# Altium PCB PCB1.PcbDoc
Units mm, origin at the board's own origin, x right, y up, seen from the top; angles counter-clockwise.
Board outline 50.8 x 32.51 mm, 4 copper layers (Top Electric, MidTop Electric, MidBot Electric, Bottom Electric), stack 0.603 mm thick; 10 components, 12 nets, 29 pads, 20 vias.
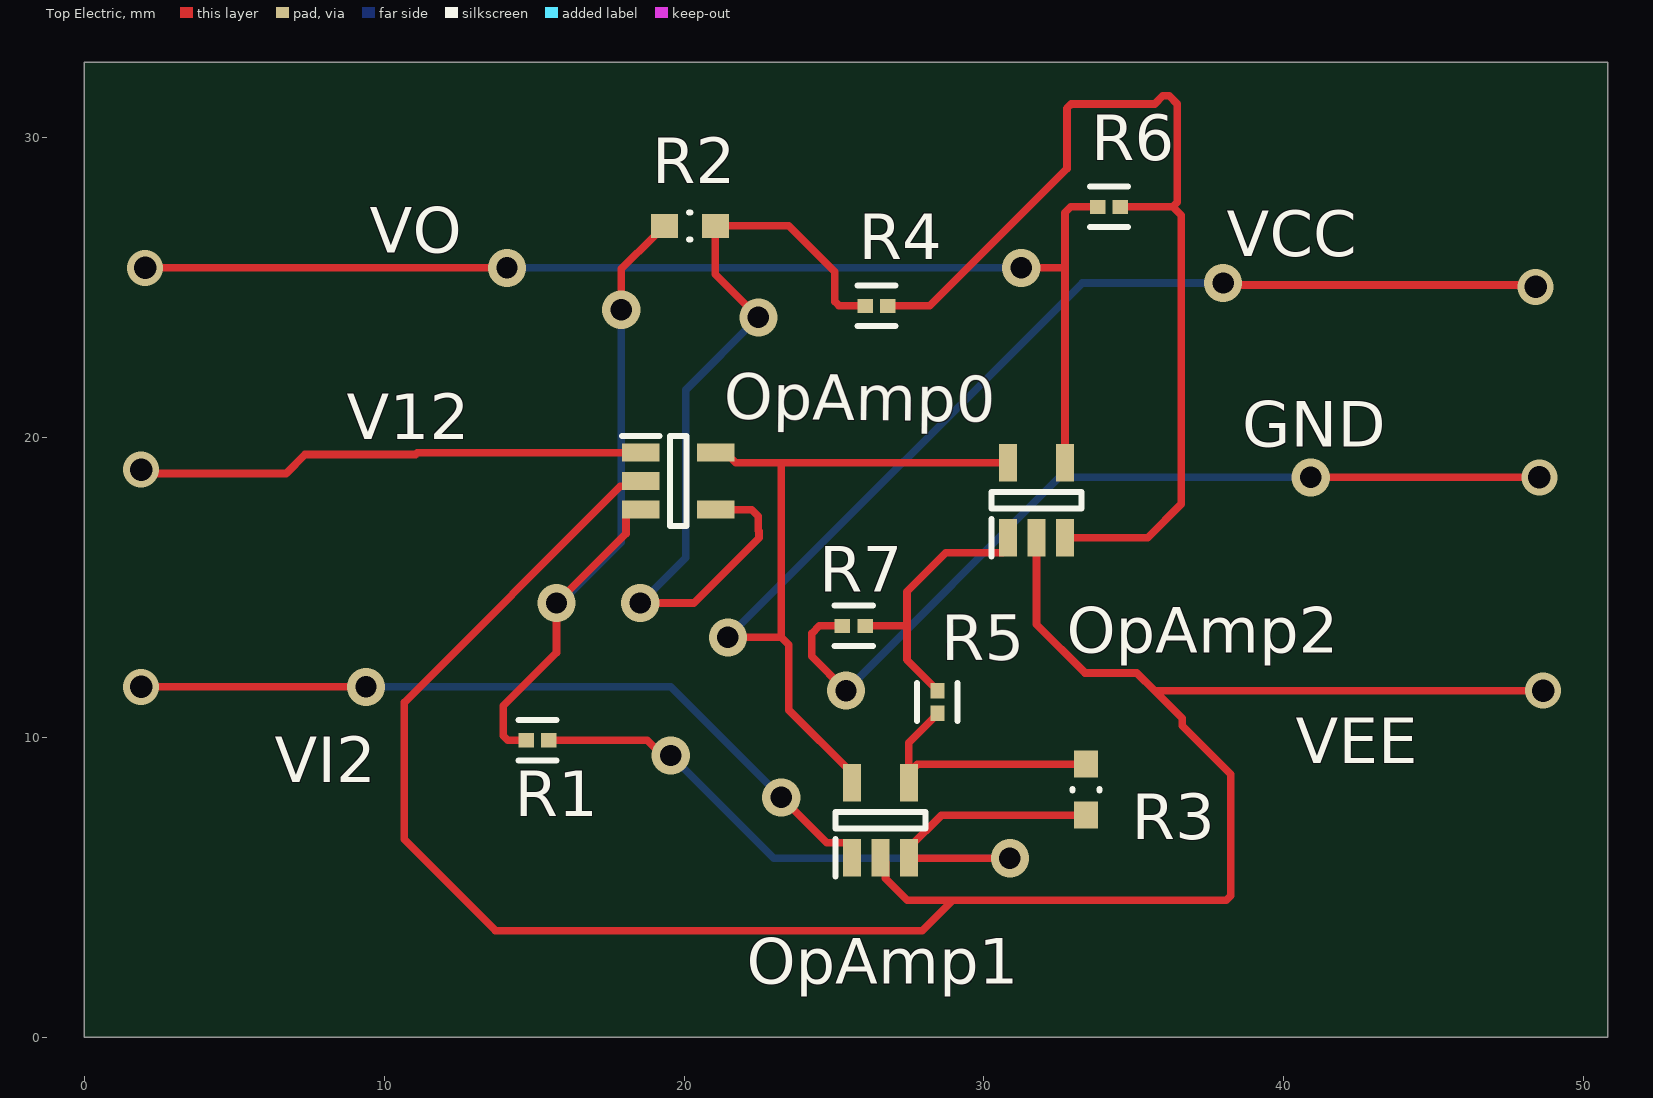
[diagram p0: Top Electric view]
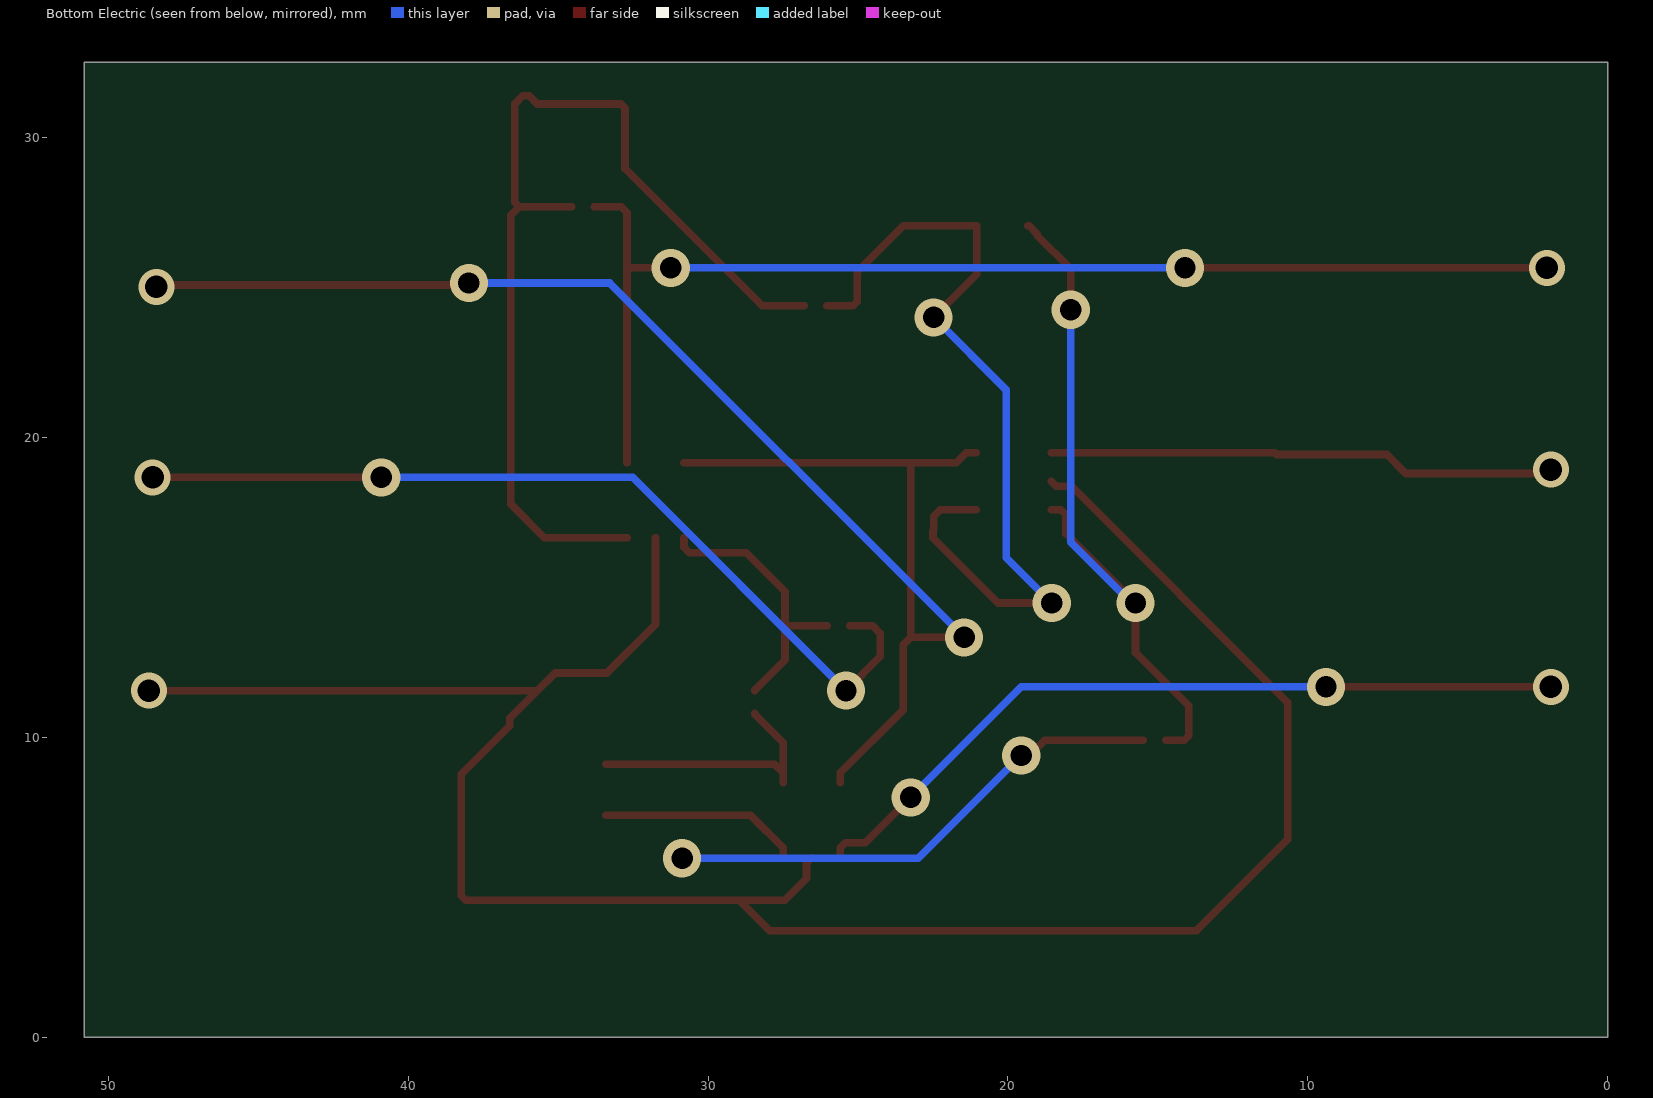
[diagram p1: Bottom Electric view, seen from below]
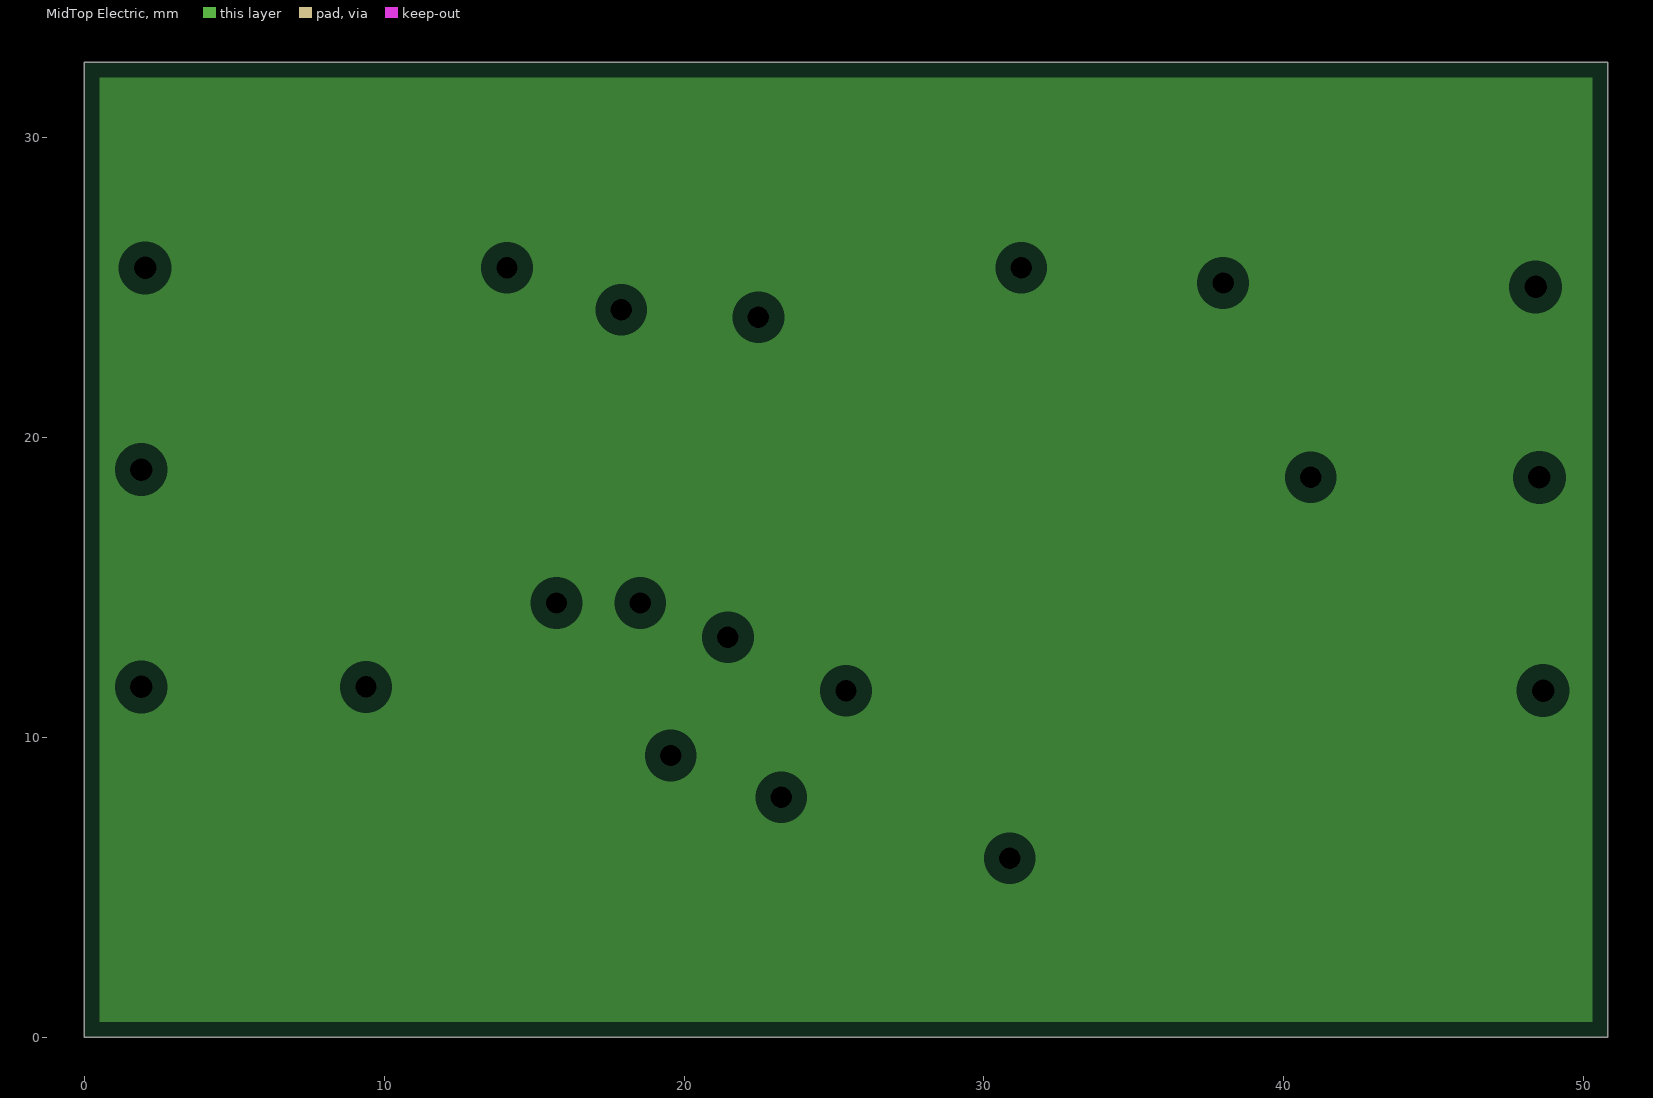
[diagram p2: MidTop Electric, clearances drawn from the general rule]
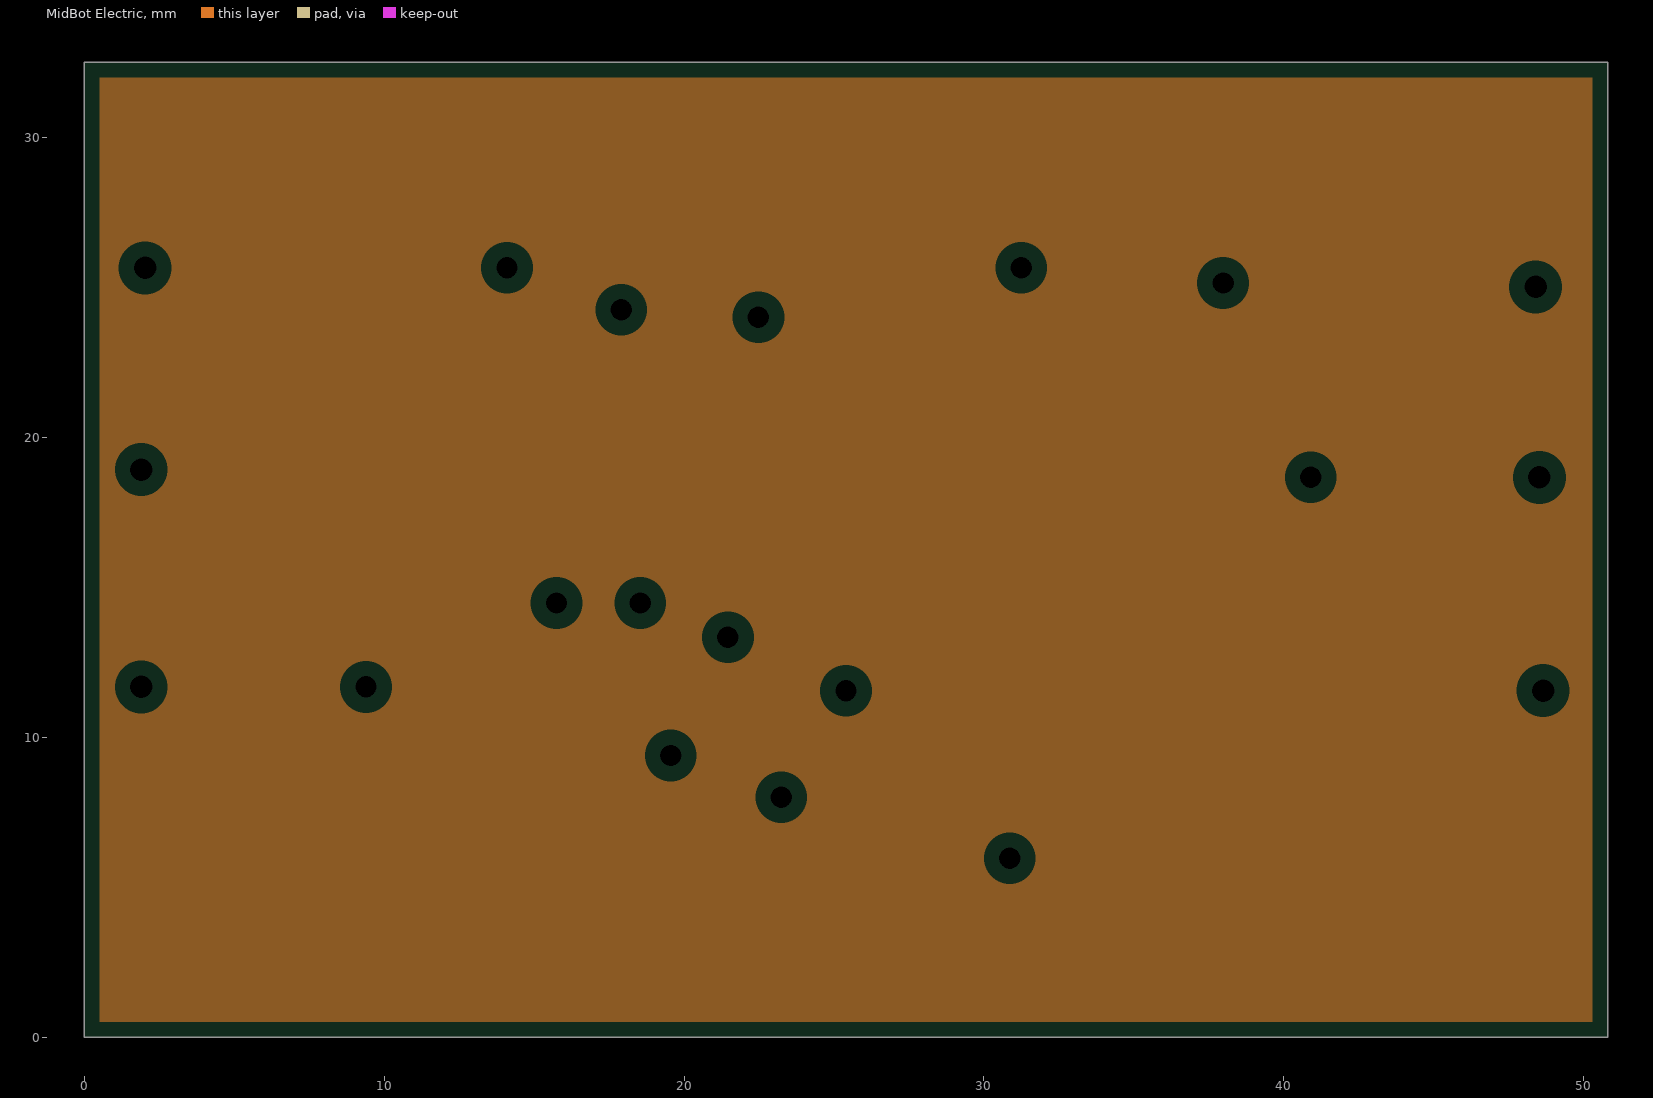
[diagram p3: MidBot Electric, clearances drawn from the general rule]
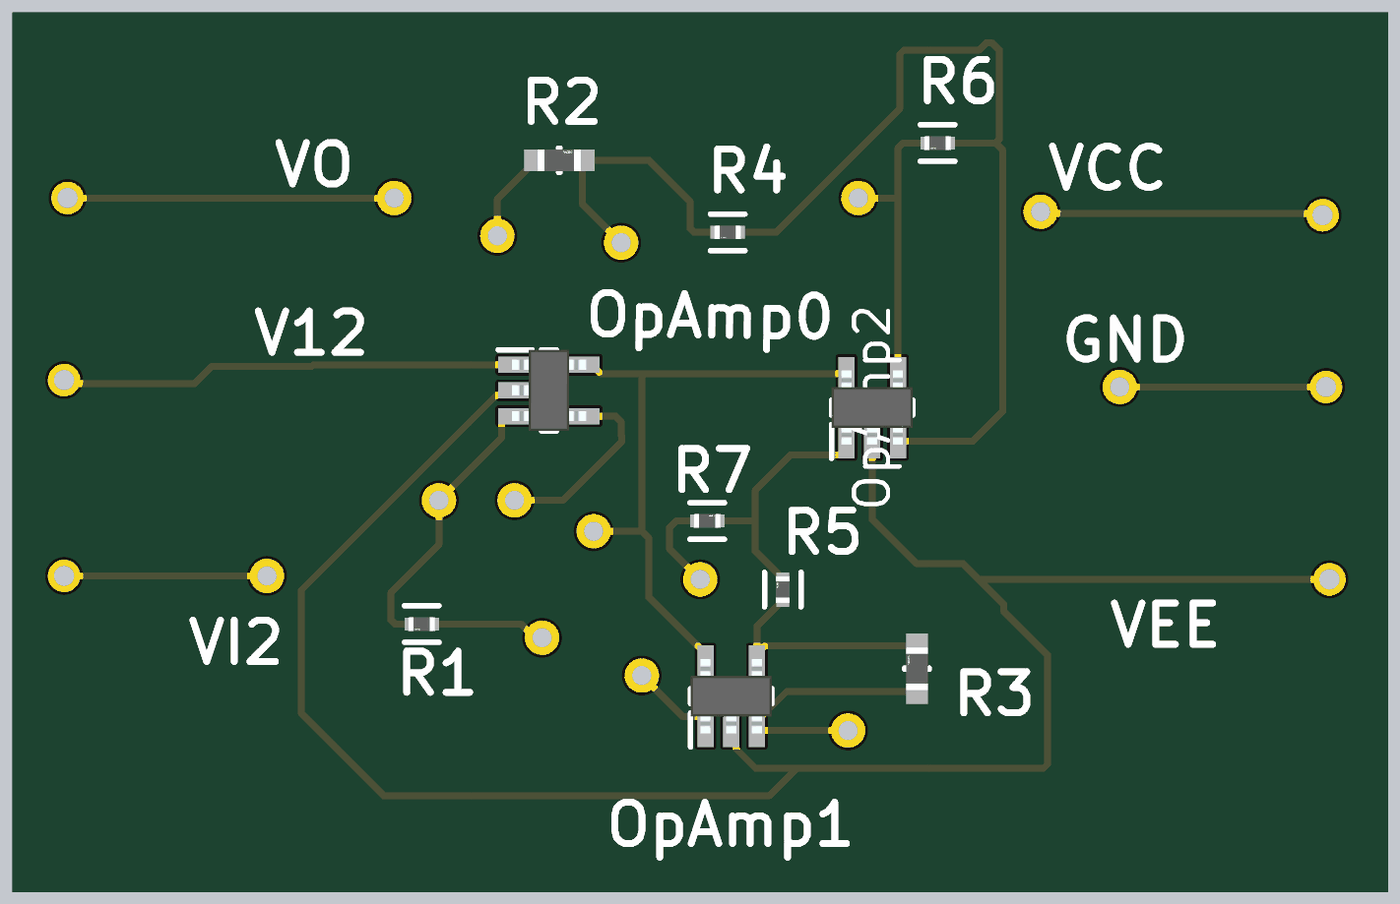
[diagram p4: 3D render of the assembled board from above, using the file's embedded part models]

## Layer stack, top to bottom
Top Solder: solder mask 0.0102, Solder Resist, Dk 3.5
Top Electric: signal copper 0.0356
Dielectric 2: prepreg 0.0711, PP-006, Dk 4.1
MidTop Electric: plane copper 0.035
Dielectric 1: dielectric 0.32, FR-4, Dk 4.8
MidBot Electric: plane copper 0.035
Dielectric 3: prepreg 0.0711, PP-006, Dk 4.1
Bottom Electric: signal copper 0.0356
Bottom Solder: solder mask 0.0102, Solder Resist, Dk 3.5

## Board outline
0,0 50.8,0 50.8,32.512 0,32.512

## Design rules (kind name [scope] priority, off if disabled: settings)
Clearance [All] p1: gap=0.254 ignorepadtopadclearanceinfootprint=FALSE
PlaneClearance [All] p1: clearance=0.508
PlaneConnect [All] p1: planeconnectstyle=Relief reliefexpansion=0.508 reliefentries=4 reliefconductorwidth=0.254 reliefairgap=0.254
PolygonConnect [All] p1: connectstyle=Relief reliefconductorwidth=0.254 reliefentries=4 polygonreliefangle="90 Angle" airgapwidth=0.254
RoutingVias [All] p1: holewidth=0.711 width=1.27 viastyle="Through Hole" minholewidth=0.711 minwidth=1.27 maxholewidth=0.711 maxwidth=1.27
SolderMaskExpansion [All] p1: expansion=0.102 istentingtop=FALSE
SupplyNets "Schematic Supply Nets_2" [InNet('VEE')] p1: voltage=0.000
SupplyNets "Schematic Supply Nets_1" [InNet('VCC')] p2: voltage=0.000
SupplyNets "Schematic Supply Nets" [InNet('GND')] p3: voltage=0.000
Width [All] p1: maxlimit=0.254 minlimit=0.254 preferedwidth=0.254
28 further rules are at their usual default settings.

## Components (designator, comment, footprint, x,y, rotation, side; value= is the part's Value field where it differs from the comment)
OpAmp0 "LM321SN3T1G" SOT95P275X110-5N 19.812,18.542 r0 top
OpAmp1 "LM321SN3T1G" SOT95P275X110-5N 26.543,7.239 r90 top
OpAmp2 "LM321SN3T1G" SOT95P275X110-5N 31.75,17.907 r90 top
R1 "RC0402JR-0710KL" FP-RC0402-0_4-IPC_C 15.113,9.906 r180 top
R2 "RC0603FR-0747KL" FP-RC0603FR-0747KL-MFG 20.193,27.051 r0 top
R3 "RC0603FR-0747KL" FP-RC0603FR-0747KL-MFG 33.401,8.255 r90 top
R4 "RC0402JR-0710KL" FP-RC0402-0_4-IPC_C 26.414,24.384 r180 top
R5 "RC0402JR-0710KL" FP-RC0402-0_4-IPC_C 28.448,11.178 r90 top
R6 "RC0402JR-0710KL" FP-RC0402-0_4-IPC_C 34.165,27.686 r180 top
R7 "RC0402JR-0710KL" FP-RC0402-0_4-IPC_C 25.656,13.716 r0 top

## Footprints (in the part's own frame and the unit in brackets; to place one, negate y for a bottom-side part, rotate by r counter-clockwise, add the part's x,y. Pads: shape width x height; smd on the part's side, far side on the other; paste and mask are expansions set on the pad)
FP-RC0402-0_4-IPC_C [mm]
  rect 0.515x0.472 smd paste+0 mask+0: 1(-0.379,0) 2(0.379,0)
  silkscreen extent -0.64,-0.67 0.64,0.67, body extent -0.74,-0.38 0.74,0.38, height 0.25
FP-RC0603FR-0747KL-MFG [mm]
  rect 0.9x0.8 smd paste+0 mask+0: 1(-0.85,0) 2(0.85,0)
  silkscreen extent -0.03,-0.45 0.03,0.45, body extent -1.4,-0.55 1.4,0.55, height 0.25
SOT95P275X110-5N [mm]
  rect 1.25x0.6 smd: 1(-1.25,0.95) 2(-1.25,0) 3(-1.25,-0.95) 4(1.25,-0.95) 5(1.25,0.95)
  silkscreen extent -1.88,-1.5 0.28,1.5, body extent -1.38,-1.5 1.38,1.5, height 1.1

## Part data
OpAmp0 OpAmp1 OpAmp2: "Integrated Circuit", Manufacturer_Name=onsemi, Mouser Part Number=863-LM321SN3T1G, Arrow Part Number=LM321SN3T1G, Arrow Price/Stock=https://www.arrow.com/en/products/lm321sn3t1g/on-semiconductor?utm_currency=USD&region=nac, Datasheet Link=https://www.onsemi.com/pub/Collateral/LM321-D.PDF, Height=1.1mm, Manufacturer_Part_Number=LM321SN3T1G, Mouser Price/Stock=https://www.mouser.co.uk/ProductDetail/onsemi/LM321SN3T1G?qs=slMPpRTKD5qNVsCzBsHVZA%3D%3D
R1 R4 R5 R6 R7: library part CMP-2002-07915-3, "RES 10K OHM 5% 1/16W 0402", Case Code (Imperial)=0402, Case Code (Metric)=1005, Max Operating Temperature=155°C, Max Power Dissipation=63mW, Min Operating Temperature=-55°C, Package Quantity=1, Power Rating=62.5mW, Resistance=10kR, Resistance Tolerance=5%, Resistor Type="Thick Film", Temperature Coefficient=100ppm/°C, Voltage Rating=50V, Case/Package=0402, Construction=Rectangular, Depth=0.5mm, Features="Moisture Resistant", Height=0.016inch, Lead Free="Lead Free", Length=0.039inch, Military Standard=Not, Number of Terminations=2, Packaging="Tape and Reel", RoHS Compliant=Yes, Series=RC, Size Code=0402, Termination=SMD/SMT, Tolerance=5%, Width=0.02inch
R2 R3: library part CMP-1659-00055-2, "RES SMD 47K OHM 1% 1/10W 0603", Case Code (Imperial)=0603, Case Code (Metric)=1608, Max Operating Temperature=155°C, Max Power Dissipation=100mW, Min Operating Temperature=-55°C, Package Quantity=1, Resistance=47kR, Resistance Tolerance=1%, Resistor Type="Thick Film", Temperature Coefficient=100ppm/°C, Voltage Rating=50V, Case/Package=0603, Construction=Rectangular, Depth=0.8mm, Features="Moisture Resistant", Height=0.022inch, Lead Free="Lead Free", Length=0.063inch, Military Standard=Not, Number of Pins=2, Number of Terminations=2, Packaging="Tape and Reel", Power Rating=100mW, RoHS Compliant=Yes, Series=RC, Size Code=0603, Technology="THICK FILM", Termination=SMD/SMT, Tolerance=1%, Voltage Rating (DC)=50V, Width=0.031inch

## Via types
v1: diameter 1.27, hole 0.711, Top Electric to Bottom Electric, 13 vias
v2: diameter 1.2, hole 0.75, Top Electric to Bottom Electric, 6 vias
v3: diameter 1.27/1.27 (per signal layer), hole 0.711, Top Electric to Bottom Electric, 1 vias

## Nets (pads, with @x,y where several pads share a name; then routed paths per layer and width w, separated by ;. In a path a pad name is that pad's centre, name@x,y a point inside that pad or via, vN(x,y) a via of type N, cw(c..) or ccw(c..) an arc to the next point about the centre after c; other vN are vias at no path point)
GND: R7.1 | length 29.4
  Top Electric w0.254: R7.1 24.511,13.716 24.257,13.462 24.257,12.7 v1(25.4,11.557) ; v1(40.894,18.669) v2@48.387,18.669
  Bottom Electric w0.254: v1(25.4,11.557) 32.512,18.669 v1(40.894,18.669)
  other v2: 48.514,18.669
NetOpAmp0_3: OpAmp0.3 R1.2 R2.1 | length 24.6
  Top Electric w0.254: R1.2 14.119,9.906 13.97,10.055 13.97,11.049 15.748,12.827 v1(15.748,14.478) 18.064,16.794 18.064,17.419 18.237,17.592 OpAmp0.3 ; v1(17.907,24.257) 17.907,25.615 19.02,26.728 19.02,26.778 19.293,27.051 R2.1
  Bottom Electric w0.254: v1(15.748,14.478) 15.875,14.478 17.907,16.51 v1(17.907,24.257)
NetOpAmp0_4: OpAmp0.4 R2.2 R4.2 | length 28.6
  Top Electric w0.254: v1(18.542,14.478) 20.32,14.478 22.501,16.659 22.501,16.869 22.479,16.891 22.479,17.377 22.264,17.592 OpAmp0.4 ; v3(22.479,24.003) 21.043,25.439 R2.2 23.495,27.051 25.019,25.527 25.019,24.533 25.168,24.384 R4.2
  Bottom Electric w0.254: v1(18.542,14.478) 20.056,15.992 20.056,21.58 v3(22.479,24.003)
NetOpAmp1_3: OpAmp1.3 R1.1 R3.1 | length 27.1
  Top Electric w0.254: R1.1 18.775,9.906 19.283,9.398 v1(19.558,9.398) ; v1(30.861,5.969) 27.513,5.969 OpAmp1.3 27.493,6.314 28.584,7.405 R3.1
  Bottom Electric w0.254: v1(19.558,9.398) 22.987,5.969 v1(30.861,5.969)
NetOpAmp1_4: OpAmp1.4 R3.2 R5.1 | length 9.1
  Top Electric w0.254: R5.1 28.448,10.778 27.493,9.823 OpAmp1.4 27.493,8.814 27.784,9.105 R3.2
NetOpAmp2_1: OpAmp2.1 R5.2 R7.2 | length 9.4
  Top Electric w0.254: R7.2 26.046,13.727 27.432,13.727 ; R5.2 28.448,11.578 27.432,12.594 27.432,13.727 ; OpAmp2.1 30.8,16.332 30.627,16.159 28.732,16.159 27.432,14.859 27.432,13.727
NetOpAmp2_4: OpAmp2.4 R6.2 | length 39.9
  Top Electric w0.254: v2@2.286,25.654 v1(14.097,25.654) ; v1(31.242,25.654) 32.7,25.654 ; OpAmp2.4 32.7,25.654 ; R6.2 32.893,27.686 32.7,27.493 32.7,25.654
  Bottom Electric w0.254: v1(14.097,25.654) v1(31.242,25.654)
  other v2: 2.032,25.654
R4_Connect: OpAmp2.3 R4.1 R6.1 | length 33.5
  Top Electric w0.254: R4.1 28.194,24.384 32.766,28.956 32.766,30.966 32.915,31.115 35.687,31.115 35.963,31.391 36.173,31.391 36.449,31.115 36.449,27.835 36.3,27.686 ; OpAmp2.3 35.453,16.657 36.576,17.78 36.576,27.41 36.3,27.686 ; R6.1 36.3,27.686
VCC: OpAmp0.5 OpAmp1.5 OpAmp2.5 | length 55.2
  Top Electric w0.254: OpAmp0.5 21.387,19.492 21.722,19.157 23.241,19.157 ; v1(21.463,13.335) 23.241,13.335 ; OpAmp1.5 25.593,8.814 23.495,10.912 23.495,13.081 23.241,13.335 ; OpAmp2.5 23.241,19.157 ; v1(37.973,25.146) 38.036,25.082 48.323,25.082 v2(48.387,25.019) ; 23.241,13.335 23.241,19.157
  Bottom Electric w0.254: v1(21.463,13.335) 33.274,25.146 v1(37.973,25.146)
VEE: OpAmp0.2 OpAmp1.2 OpAmp2.2 | length 76.3
  Top Electric w0.254: OpAmp0.2 18.389,18.369 17.875,18.369 10.668,11.162 10.668,6.604 13.716,3.556 27.94,3.556 28.956,4.572 ; OpAmp1.2 26.716,5.816 26.716,5.302 27.446,4.572 28.956,4.572 ; OpAmp2.2 31.75,13.765 33.369,12.146 35.098,12.146 35.687,11.557 ; v2@48.278,11.557 35.687,11.557 ; 28.956,4.572 38.078,4.572 38.227,4.721 38.227,8.763 36.608,10.382 36.608,10.636 35.687,11.557
  other v2: 48.641,11.557
VI1: OpAmp0.1 | length 17.2
  Top Electric w0.254: v2@1.651,18.796 6.731,18.796 7.366,19.431 11.049,19.431 11.11,19.492 OpAmp0.1
  other v2: 1.905,18.923
VI2: OpAmp1.1 | length 26.5
  Top Electric w0.254: v2@1.651,11.684 v1(9.398,11.684) ; v1(23.241,8.001) 24.755,6.487 25.42,6.487 25.593,6.314 OpAmp1.1
  Bottom Electric w0.254: v1(9.398,11.684) 19.558,11.684 v1(23.241,8.001)
  other v2: 1.905,11.684

## Polygon pours and split planes (outlines as drawn)
no net on MidTop Electric (split plane): 50.29,0.51 0.51,0.51 0.51,32.002 50.29,32.002
no net on MidBot Electric (split plane): 50.29,0.51 0.51,0.51 0.51,32.002 50.29,32.002

## Silkscreen, mask and mechanical layers (free items; w line width, h text height)
Top Overlay:
  text "VO" at 9.525,26.162 h1.52
  text "VCC" at 38.1,26.035 h1.52
  text "V12" at 8.763,19.939 h1.52
  text "GND" at 38.608,19.685 h1.52
  text "VEE" at 40.386,9.144 h1.52
  text "VI2" at 6.35,8.509 h1.52